# Altium PCB IMU.PcbDoc
Units mm, origin at the board's own origin, x right, y up, seen from the top; angles counter-clockwise.
Board outline 36 x 36 mm, 2 copper layers (Top Layer, Bottom Layer), stack 1.554 mm thick; 39 components, 41 nets, 301 pads, 0 vias.
Unrouted connection lines stored in the file: 118.
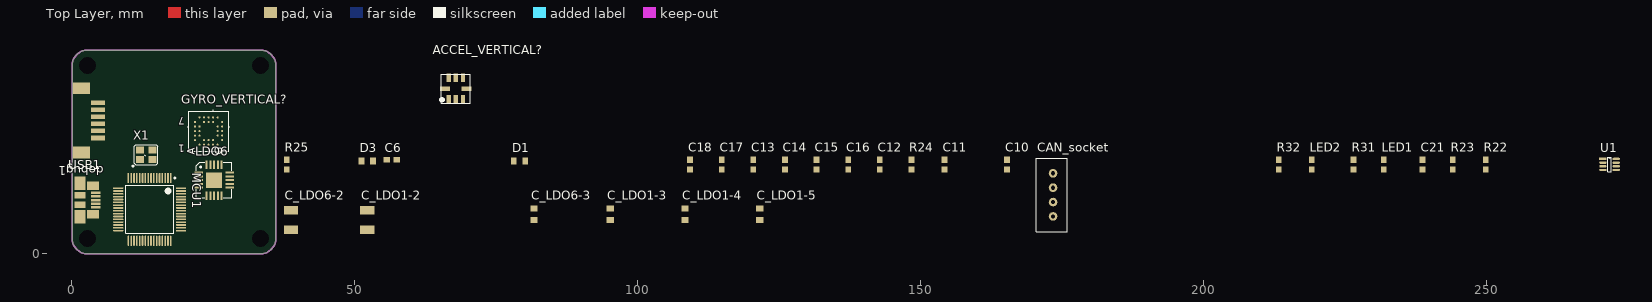
[diagram p0: Top Layer view]
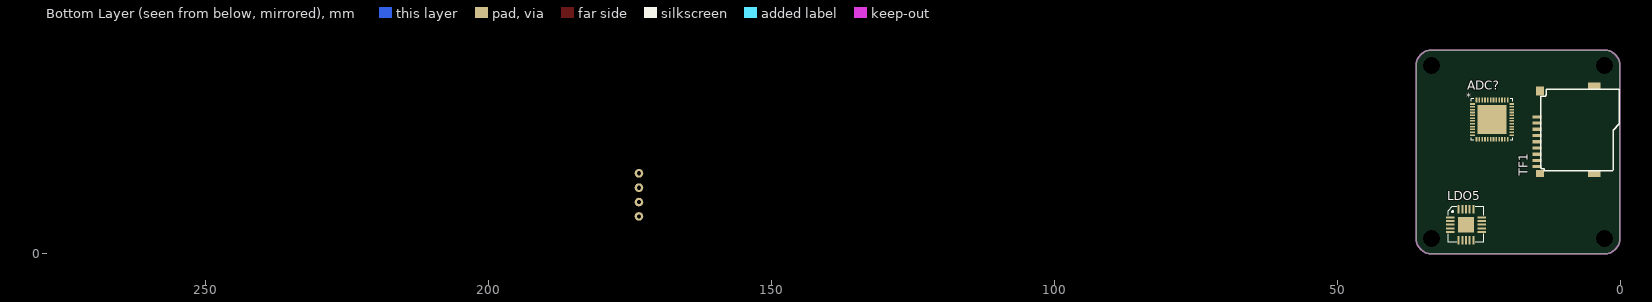
[diagram p1: Bottom Layer view, seen from below]

## Layer stack, top to bottom
Top Solder: solder mask 0.0102, Solder Resist, Dk 3.5
Top Layer: signal copper 0.0356
Dielectric1: core 1.4834, FR-4, Dk 4.8
Bottom Layer: signal copper 0.0356
Bottom Solder: solder mask 0.0102, Solder Resist, Dk 3.5

## Board outline
0.019,2.769 ccw(c2.769,2.769) 2.769,0.019 33.269,0.019 ccw(c33.269,2.769) 36.019,2.769 36.019,33.269 ccw(c33.269,33.269) 33.269,36.019 2.769,36.019 ccw(c2.769,33.269) 0.019,33.269

## Design rules (kind name [scope] priority, off if disabled: settings)
AcuteAngle [All] p1: minimum=6.00000000000000E+0001 checktracksonly=FALSE
Clearance [All] p1: gap=0.152
ComponentClearance ComponentClearance_servo_headers [InComponent('JP1') or InComponent('JP2') or InComponent('JP3') or InComponent('JP4') or InComponent('JP5') or InComponent('JP6')] p1: gap=0.127 collisioncheckmode=3 verticalgap=0.254 showdistances=FALSE
ComponentClearance [All] p2: gap=0.254 collisioncheckmode=3 verticalgap=0.254 showdistances=FALSE
DiffPairsRouting [All] p1: maxlimit=0.508 minlimit=0.152 mostfreqgap=0.254 toplayer_minwidth=0.381 toplayer_maxwidth=0.381 toplayer_prefwidth=0.381 bottomlayer_minwidth=0.381 bottomlayer_maxwidth=0.381 bottomlayer_prefwidth=0.381 maxuncoupledlength=12.7
HoleSize [All] p1: absolutevalues=TRUE maxlimit=25.4 minlimit=0.305 maxpercent=80.000 minpercent=20.000
MinimumAnnularRing [All] p1: minimumring=0.203
MinimumSolderMaskSliver MinimumSolderMaskSliver_FIL1-3 [InComponent('FIL1') or InComponent('FIL2') or InComponent('FIL3')] p1: minsoldermaskwidth=0.025
MinimumSolderMaskSliver [All] p2: minsoldermaskwidth=0.076
PlaneClearance [All] p1: clearance=0.381
PlaneConnect [All] p1: planeconnectstyle=Direct reliefexpansion=0.508 reliefentries=4 reliefconductorwidth=0.254 reliefairgap=0.254
PolygonConnect PolygonConnect_usb [InComponent('CONN4')] p1: connectstyle=Relief reliefconductorwidth=0.559 reliefentries=4 polygonreliefangle="90 Angle" airgapwidth=0.254
PolygonConnect [All] p2: connectstyle=Direct reliefconductorwidth=0.305 reliefentries=4 polygonreliefangle="90 Angle" airgapwidth=0.254
RoomDefinition power [InComponentClass('power')] p1: confinementstyle=ConfineIn formatcopy=TRUE lockcomponents=FALSE outline 53.183,-9.846 60.676,-9.846 60.676,0.187 53.183,0.187
RoomDefinition IMU [InComponentClass('IMU')] p2: confinementstyle=ConfineIn formatcopy=TRUE lockcomponents=FALSE outline 37.186,11.709 82.398,11.709 82.398,23.012 37.186,23.012
RoomDefinition ADC [InComponentClass('ADC')] p3: confinementstyle=ConfineIn formatcopy=TRUE lockcomponents=FALSE outline 37.186,1.549 46.203,1.549 46.203,12.979 37.186,12.979
RoomDefinition MCU [InComponentClass('MCU')] p4: confinementstyle=ConfineIn formatcopy=TRUE lockcomponents=FALSE outline 37.186,1.549 273.787,1.549 273.787,19.964 37.186,19.964
RoutingVias [All] p1: holewidth=0.381 width=0.787 viastyle="Through Hole" minholewidth=0.305 minwidth=0.711 maxholewidth=0.711 maxwidth=1.27
SilkToSilkClearance SilkToSilkClearance_text [IsText] p1: silktosilkclearance=0
SilkToSilkClearance [All] p2: silktosilkclearance=0.102
SilkToSolderMaskClearance SilkscreenOverComponentPads [IsPad] p1: minsilkscreentomaskgap=0.051 clearancetoexposedcopper=TRUE
SolderMaskExpansion [All] p1: expansion=0.076
UnpouredPolygon [All] p1: allowunpoured=FALSE
Width [All] p1: maxlimit=10.16 minlimit=0.152 preferedwidth=0.254
21 further rules are at their usual default settings.

## Classes and differential pairs
component class power: C_LDO1-2 C_LDO1-3 C_LDO1-4 C_LDO1-5 C_LDO6-2 C_LDO6-3 LDO5 LDO6
component class IMU: ACCEL_VERTICAL? GYRO_VERTICAL?
component class ADC: ADC?
component class MCU: C6 C10 C11 C12 C13 C14 C15 C16 C17 C18 C21 CAN_socket D1 D3 debug1 LED1 LED2 MCU1 R22 R23 R24 R25 R31 R32 TF1 U1 USB1 X1
differential pair USB: +USB_P -USB_N
differential pair CAN: +CAN_P -CAN_N

## Components (designator, comment, footprint, x,y, rotation, side; value= is the part's Value field where it differs from the comment)
ACCEL_VERTICAL? "ADXL203CE" ADXL203 67.818,29.21 r90 top
ADC? "ADS1258_RTC_48" "RTC48_5P1X5P1 - weak" 22.606,23.749 r180 bottom
C6 "0.1uf" 0603 56.49,16.662 r0 top
C10 "20pF" 0603 165.202,15.773 r90 top
C11 "20pF" 0603 154.153,15.773 r90 top
C12 "2.2uf" 0603 142.723,15.773 r90 top
C13 "0.1uF" 0603 120.371,15.773 r90 top
C14 "0.1uF" 0603 125.959,15.773 r90 top
C15 "0.1uF" 0603 131.547,15.773 r90 top
C16 "4.7uF" 0603 137.135,15.773 r90 top
C17 "0.1uF" 0603 114.783,15.773 r90 top
C18 "2.2uf" 0603 109.195,15.773 r90 top
C21 "100pF" 0603 238.608,15.773 r90 top
C_LDO1-2 "Cap2" 1210 52.172,5.994 r90 top
C_LDO1-3 "" 0805 95.098,7.01 r90 top
C_LDO1-4 "" 0805 108.306,7.01 r90 top
C_LDO1-5 "" 0805 121.514,7.01 r90 top
C_LDO6-2 "Cap2" 1210 38.71,5.994 r90 top
C_LDO6-3 "" 0805 81.636,7.01 r90 top
CAN_socket "4PSocket" 4pSocket-s 173.33,10.439 r90 top
D1 "Diode" 0805 79.096,16.408 r0 top
D3 "Diode" 0805 52.172,16.408 r0 top
debug1 "debug" WFRSM125 4.572,22.987 r270 top
GYRO_VERTICAL? "ADXRS620BBGZ" BG_32_3 24.13,21.717 r90 top
LDO5 "TPS7A4700" "TPS7A4700 - b" 29.718,6.477 r180 bottom
LDO6 "TPS7A4700" "TPS7A4700 - b" 22.606,14.351 r0 top
LED1 "LED0" 0603 231.75,15.773 r90 top
LED2 "LED0" 0603 219.05,15.773 r90 top
MCU1 "STM32F103R8T6" LQFP64_N 13.716,7.874 r270 top
R22 "60R" 0603 249.784,15.773 r90 top
R23 "60R" 0603 243.942,15.773 r90 top
R24 "10k" 0603 148.311,15.773 r90 top
R25 "10k" 0603 37.948,15.773 r90 top
R31 "200R" 0603 226.416,15.773 r90 top
R32 "200R" 0603 213.208,15.773 r90 top
TF1 "TF" TF 4.572,14.224 r90 bottom
U1 "MAX3051" SOT-8 270.485,16.789 r0 top
USB1 "USB Micro Type B" MOLEX-47346-0001 1.397,9.525 r0 top
X1 "8mhz" OSCILLATOR-3.2X2.5 13.081,17.526 r0 top

## Footprints (in the part's own frame and the unit in brackets; to place one, negate y for a bottom-side part, rotate by r counter-clockwise, add the part's x,y. Pads: shape width x height; smd on the part's side, far side on the other; paste and mask are expansions set on the pad)
4pSocket-s [mil]
  round 60 hole 30: 1(-150,0) 2(-50,0) 3(50,0) 4(150,0)
  silkscreen extent -256,-99 256,118
0603 [mil] "0603-RES"
  rect 44x40 smd: 1(-33.46,0) 2(34,0)
0805 [mm]
  rect 1x1.27 smd: 1(-1.016,0) 2(1.016,0)
  body extent -1.27,-0.76 1.27,0.76, height 0.8
1210 [mm]
  rect 1.52x2.5 smd: 1(-1.715,0) 2(1.715,0)
ADXL203 [mil]
  rect 60x30 smd: 1(-75,50) 2(-75,0) 3(-75,-50) 5(75,-50) 6(75,0) 7(75,50)
  rect 30x70 smd: 4(0,-75) 8(0,75)
  silkscreen extent -100,-100 100,100, body extent -100,-100 100,100, height 80
BG_32_3 [mil]
  round 14 smd: A2(-62.99,94.49) A3(-31.5,94.49) A4(0,94.49) A5(31.5,94.49) A6(62.99,94.49) B1(-94.49,62.99) B3(-31.5,62.99) B4(0,62.99) B5(31.5,62.99) B7(94.49,62.99) C1(-94.49,31.5) C2(-62.99,31.5) C6(62.99,31.5) C7(94.49,31.5) D1(-94.49,0) D2(-62.99,0) D6(62.99,0) D7(94.49,0) E1(-94.49,-31.5) E2(-62.99,-31.5) E6(62.99,-31.5) E7(94.49,-31.5) F1(-94.49,-62.99) F3(-31.5,-62.99) F4(0,-62.99) F5(31.5,-62.99) F7(94.49,-62.99) G2(-62.99,-94.49) G3(-31.5,-94.49) G4(0,-94.49) G5(31.5,-94.49) G6(62.99,-94.49)
  silkscreen extent -149,-149 149,149, body extent -139,-139 139,139, height 138
LQFP64_N [mm]
  oval 1.8x0.3 smd: 1(-5.55,3.75) 2(-5.55,3.25) 3(-5.55,2.75) 4(-5.55,2.25) 5(-5.55,1.75) 6(-5.55,1.25) 7(-5.55,0.75) 8(-5.55,0.25) 9(-5.55,-0.25) 10(-5.55,-0.75) 11(-5.55,-1.25) 12(-5.55,-1.75) 13(-5.55,-2.25) 14(-5.55,-2.75) 15(-5.55,-3.25) 16(-5.55,-3.75) 33(5.55,-3.75) 34(5.55,-3.25) 35(5.55,-2.75) 36(5.55,-2.25) 37(5.55,-1.75) 38(5.55,-1.25) 39(5.55,-0.75) 40(5.55,-0.25) 41(5.55,0.25) 42(5.55,0.75) 43(5.55,1.25) 44(5.55,1.75) 45(5.55,2.25) 46(5.55,2.75) 47(5.55,3.25) 48(5.55,3.75)
  oval 0.3x1.8 smd: 17(-3.75,-5.55) 18(-3.25,-5.55) 19(-2.75,-5.55) 20(-2.25,-5.55) 21(-1.75,-5.55) 22(-1.25,-5.55) 23(-0.75,-5.55) 24(-0.25,-5.55) 25(0.25,-5.55) 26(0.75,-5.55) 27(1.25,-5.55) 28(1.75,-5.55) 29(2.25,-5.55) 30(2.75,-5.55) 31(3.25,-5.55) 32(3.75,-5.55) 49(3.75,5.55) 50(3.25,5.55) 51(2.75,5.55) 52(2.25,5.55) 53(1.75,5.55) 54(1.25,5.55) 55(0.75,5.55) 56(0.25,5.55) 57(-0.25,5.55) 58(-0.75,5.55) 59(-1.25,5.55) 60(-1.75,5.55) 61(-2.25,5.55) 62(-2.75,5.55) 63(-3.25,5.55) 64(-3.75,5.55)
  silkscreen extent -5.67,-4.25 4.25,4.58
MOLEX-47346-0001 [mil] "MOLEX-47346-0001"
  rect 67x18 smd: 1(111,52) 2(111,26) 3(111,0) 4(111,-25.59) 5(111,-51.18)
  rect 75x94 smd: 5(0,-116.14) 5(0,117)
  rect 75x47 smd: 5(0,-32.97) 5(0,33)
  rect 83x59 smd: 5(91,-98.43) 5(91,99)
OSCILLATOR-3.2X2.5 [mil] "OSCILLATOR-3.2X2.5"
  rect 56x48 smd: 1(-43.31,-33.46) 2(44,-33.46) 3(44,34) 4(-43.31,34)
  silkscreen extent -95,-83 83,71
"RTC48_5P1X5P1 - weak" [mm]
  rect 0.85x0.28 smd paste-0.14: 1(-3.475,2.75) 2(-3.475,2.25) 3(-3.475,1.75) 4(-3.475,1.25) 5(-3.475,0.75) 6(-3.475,0.25) 7(-3.475,-0.25) 8(-3.475,-0.75) 9(-3.475,-1.25) 10(-3.475,-1.75) 11(-3.475,-2.25) 12(-3.475,-2.75) 25(3.475,-2.75) 26(3.475,-2.25) 27(3.475,-1.75) 28(3.475,-1.25) 29(3.475,-0.75) 30(3.475,-0.25) 31(3.475,0.25) 32(3.475,0.75) 33(3.475,1.25) 34(3.475,1.75) 35(3.475,2.25) 36(3.475,2.75)
  rect 0.28x0.85 smd paste-0.14: 13(-2.751,-3.475) 14(-2.251,-3.475) 15(-1.75,-3.475) 16(-1.25,-3.475) 17(-0.75,-3.475) 18(-0.25,-3.475) 19(0.25,-3.475) 20(0.75,-3.475) 21(1.25,-3.475) 22(1.75,-3.475) 23(2.251,-3.475) 24(2.751,-3.475) 37(2.751,3.475) 38(2.251,3.475) 39(1.75,3.475) 40(1.25,3.475) 41(0.75,3.475) 42(0.25,3.475) 43(-0.25,3.475) 44(-0.75,3.475) 45(-1.25,3.475) 46(-1.75,3.475) 47(-2.251,3.475) 48(-2.751,3.475)
  rect 5.1x5.1 smd paste-2.537 mask-2.54: 49(0,0)
  silkscreen extent -3.68,-3.68 3.68,3.68
SOT-8 [mm]
  rect 1.3x0.42 smd: 1(0,0)
  oval 1.3x0.42 smd: 2(0,-0.65) 3(0,-1.3) 4(0,-1.95) 5(2.35,-1.95) 6(2.35,-1.3) 7(2.35,-0.65) 8(2.35,0)
  silkscreen extent 0.87,-2.28 1.48,0.33
TF [mm]
  rect 0.55x1.6 smd: 1(10,10.1) 2(8.9,10.1) 3(7.8,10.1) 4(6.7,10.1) 5(5.6,10.1) 6(4.5,10.1) 7(3.4,10.1) 8(2.3,10.1) 9(1.2,10.1)
  rect 1.2x2.2 smd: SHELL(0,0) SHELL(15.5,0)
  rect 1.2x1.4 smd: SHELL(0,9.6)
  rect 1.6x1.4 smd: SHELL(14.6,9.6)
  silkscreen extent 0.41,-4.42 14.9,9.4
"TPS7A4700 - b" [mm]
  rect 2.8x2.8 smd: 0(2.515,-1.321)
  rect 1.5x0.35 smd: 1(-0.25,0) 2(-0.25,-0.65) 3(-0.25,-1.3) 4(-0.25,-1.95) 5(-0.25,-2.6) 11(5.25,-2.6) 12(5.25,-1.95) 13(5.25,-1.3) 14(5.25,-0.65) 15(5.25,0)
  rect 0.35x1.5 smd: 6(1.2,-4.05) 7(1.85,-4.05) 8(2.5,-4.05) 9(3.15,-4.05) 10(3.8,-4.05) 16(3.8,1.45) 17(3.15,1.45) 18(2.5,1.45) 19(1.85,1.45) 20(1.2,1.45)
  silkscreen extent -0.65,-4.45 5.65,1.85
WFRSM125 [mm]
  rect 0.81x2.5 smd: 1(-3.75,0) 2(-2.5,0) 3(-1.25,0) 4(0,0) 5(1.25,0) 6(2.5,0)
  rect 2.1x3 smd: shell(-6.3,-2.9) shell(5.05,-2.9)
  body extent -6.79,-3.82 5.46,0.38, height 3.4

## Part data
ACCEL_VERTICAL? ADC? GYRO_VERTICAL?: "Imported"
C6 C10 C11 C12 C13 C14 C15 C16 C17 C18 C21: library part CAP0402-CAP, "电容"
C_LDO1-2 C_LDO6-2: "Capacitor"
C_LDO1-3 C_LDO1-4 C_LDO1-5 C_LDO6-3: library part Cap, "Capacitor"
D1 D3: "Default Diode"
LED1 LED2: "Typical INFRARED GaAs LED"
MCU1: "STM32 ARM-based 32-bit MCU with 64 Kbytes Flash, 64-pin LQFP, Industrial Temperature"
R22 R23 R24 R25 R31 R32: library part Res2, "电阻"
USB1: library part USB_Micro_TypeB, "Connector SMD USB Micro Type B middle mount"
X1: library part OSCILLATOR-3.2X2.5, "Crystal Oscillator in 3.2x2.5 SMD"

## Free pads (board coordinates)
  round 0 hole 3 unplated: 0(2.769,2.769) 0(2.769,33.269) 0(33.269,2.769) 0(33.269,33.269)

## Nets (pads, with @x,y where several pads share a name; then routed paths per layer and width w, separated by ;. In a path a pad name is that pad's centre, name@x,y a point inside that pad or via, vN(x,y) a via of type N, cw(c..) or ccw(c..) an arc to the next point about the centre after c; other vN are vias at no path point)
3.3: C6.2 C13.1 C14.1 C15.1 C16.2 C17.1 CAN_socket.1 debug1.4 MCU1.1 MCU1.13 MCU1.19 MCU1.32 MCU1.48 MCU1.64 R31.1 R32.1 TF1.4 U1.3
CAN_N: CAN_socket.3 R23.2 U1.6
CAN_P: CAN_socket.2 R22.2 U1.7
DC_OUT: LDO5.13 LDO5.15 LDO5.16 LDO6.13 LDO6.15 LDO6.16
GND: C6.1 C10.2 C11.2 C12.2 C13.2 C14.2 C15.2 C16.1 C17.2 C18.2 C21.1 C_LDO1-2.1 C_LDO1-3.1 C_LDO1-4.1 C_LDO1-5.1 C_LDO6-2.1 C_LDO6-3.1 CAN_socket.4 debug1.6 LDO5.6 LDO5.7 LDO5.10 LDO6.6 LDO6.7 LDO6.9 LDO6.10 LDO6.11 MCU1.12 MCU1.18 MCU1.63 pad.0 R24.2 TF1.6 TF1.SHELL U1.2 U1.8 USB1.5 X1.2 X1.4
NetC10_1: C10.1 MCU1.5 X1.3
NetC11_1: C11.1 MCU1.6 X1.1
NetC12_1: C12.1 MCU1.31
NetC18_1: C18.1 MCU1.47
NetC21_2: C21.2 R22.1 R23.1
NetC_LDO1-1_2: LDO5.14
NetC_LDO6-1_2: LDO6.14
NetD1_1: D1.1 debug1.5
NetD3_1: D3.1 USB1.1
Netdebug1_1: debug1.1 MCU1.49
Netdebug1_2: debug1.2 MCU1.55
Netdebug1_3: debug1.3 MCU1.46
NetLED1_1: LED1.1 R31.2
NetLED1_2: LED1.2 MCU1.16
NetLED2_1: LED2.1 R32.2
NetLED2_2: LED2.2 MCU1.17
NetMCU1_8: MCU1.8 U1.5
NetMCU1_14: MCU1.14
NetMCU1_39: MCU1.39 TF1.7
NetMCU1_40: MCU1.40 TF1.8
NetMCU1_43: MCU1.43 R25.1
NetMCU1_51: MCU1.51 TF1.1
NetMCU1_52: MCU1.52 TF1.2
NetMCU1_53: MCU1.53 TF1.5
NetMCU1_54: MCU1.54 TF1.3
NetMCU1_58: MCU1.58
NetMCU1_59: MCU1.59
NetMCU1_60: MCU1.60 R24.1
NetMCU1_61: MCU1.61 U1.4
NetMCU1_62: MCU1.62 U1.1
NetR25_2: R25.2 USB1.4
USB_N: MCU1.44 USB1.2
USB_P: MCU1.45 USB1.3
VCC-5.0: C_LDO1-2.2 C_LDO1-3.2 C_LDO1-4.2 C_LDO1-5.2 LDO5.1 LDO5.3 LDO5.20
VCC-6.0: C_LDO6-2.2 C_LDO6-3.2 LDO6.1 LDO6.3 LDO6.20
VMCU: D1.2 D3.2
pads on no net: ACCEL_VERTICAL?.1 ACCEL_VERTICAL?.2 ACCEL_VERTICAL?.3 ACCEL_VERTICAL?.4 ACCEL_VERTICAL?.5 ACCEL_VERTICAL?.6 ACCEL_VERTICAL?.7 ACCEL_VERTICAL?.8 ADC?.1 ADC?.2 ADC?.3 ADC?.4 ADC?.5 ADC?.6 ADC?.7 ADC?.8 ADC?.9 ADC?.10 ADC?.11 ADC?.12 ADC?.13 ADC?.14 ADC?.15 ADC?.16 ADC?.17 ADC?.18 ADC?.19 ADC?.20 ADC?.21 ADC?.22 ADC?.23 ADC?.24 ADC?.25 ADC?.26 ADC?.27 ADC?.28 ADC?.29 ADC?.30 ADC?.31 ADC?.32 ADC?.33 ADC?.34 ADC?.35 ADC?.36 ADC?.37 ADC?.38 ADC?.39 ADC?.40 ADC?.41 ADC?.42 ADC?.43 ADC?.44 ADC?.45 ADC?.46 ADC?.47 ADC?.48 ADC?.49 debug1.shell GYRO_VERTICAL?.A2 GYRO_VERTICAL?.A3 GYRO_VERTICAL?.A4 GYRO_VERTICAL?.A5 GYRO_VERTICAL?.A6 GYRO_VERTICAL?.B1 GYRO_VERTICAL?.B3 GYRO_VERTICAL?.B4 GYRO_VERTICAL?.B5 GYRO_VERTICAL?.B7 GYRO_VERTICAL?.C1 GYRO_VERTICAL?.C2 GYRO_VERTICAL?.C6 GYRO_VERTICAL?.C7 GYRO_VERTICAL?.D1 GYRO_VERTICAL?.D2 GYRO_VERTICAL?.D6 GYRO_VERTICAL?.D7 GYRO_VERTICAL?.E1 GYRO_VERTICAL?.E2 GYRO_VERTICAL?.E6 GYRO_VERTICAL?.E7 GYRO_VERTICAL?.F1 GYRO_VERTICAL?.F3 GYRO_VERTICAL?.F4 GYRO_VERTICAL?.F5 GYRO_VERTICAL?.F7 GYRO_VERTICAL?.G2 GYRO_VERTICAL?.G3 GYRO_VERTICAL?.G4 GYRO_VERTICAL?.G5 GYRO_VERTICAL?.G6 LDO5.0 LDO5.2 LDO5.4 LDO5.5 LDO5.8 LDO5.9 LDO5.11 LDO5.12 LDO5.17 LDO5.18 LDO5.19 LDO6.0 LDO6.2 LDO6.4 LDO6.5 LDO6.8 LDO6.12 LDO6.17 LDO6.18 LDO6.19 MCU1.2 MCU1.3 MCU1.4 MCU1.7 MCU1.9 MCU1.10 MCU1.11 MCU1.15 MCU1.20 MCU1.21 MCU1.22 MCU1.23 MCU1.24 MCU1.25 MCU1.26 MCU1.27 MCU1.28 MCU1.29 MCU1.30 MCU1.33 MCU1.34 MCU1.35 MCU1.36 MCU1.37 MCU1.38 MCU1.41 MCU1.42 MCU1.50 MCU1.56 MCU1.57 TF1.9

## Keep-outs
Keep-Out Layer:
  the board outline again, w0.254

## Silkscreen, mask and mechanical layers (free items; w line width, h text height)
Mechanical 1:
  the board outline again, w0.254

## Dimensions
0.019,-0.481 to 36.019,-0.731 on Dimensions
2.769,-0.481 to 33.269,-0.481 on Dimensions
-0.481,2.769 to -0.481,33.269 on Dimensions
-0.481,0.019 to -0.481,36.019 on Dimensions

## Text inside footprints (layer, text, board x,y; h text height)
ADC?: Bottom Overlay "*" at 27.141,27.13 h1.27; Mechanical 2 "*" at 27.141,27.13 h1.27
GYRO_VERTICAL?: Top Overlay "A" at 21.73,17.551 h1.27 r90; Top Overlay "G" at 26.53,17.551 h1.27 r90; Top Overlay "1" at 19.964,19.317 h1.27 r180; Top Overlay "7" at 19.964,24.117 h1.27 r180; Mechanical 1 "A" at 21.73,17.551 h1.27 r90; Mechanical 1 "G" at 26.53,17.551 h1.27 r90; Mechanical 1 "1" at 19.964,19.317 h1.27 r180; Mechanical 1 "7" at 19.964,24.117 h1.27 r180